# Altium PCB PCB2.PcbDoc
Units mil, origin at the board's own origin, x right, y up, seen from the top; angles counter-clockwise.
Board outline 3180.03 x 2085.02 mil, 2 copper layers (Top Layer, Bottom Layer); 13 components, 12 nets, 33 pads, 0 vias.
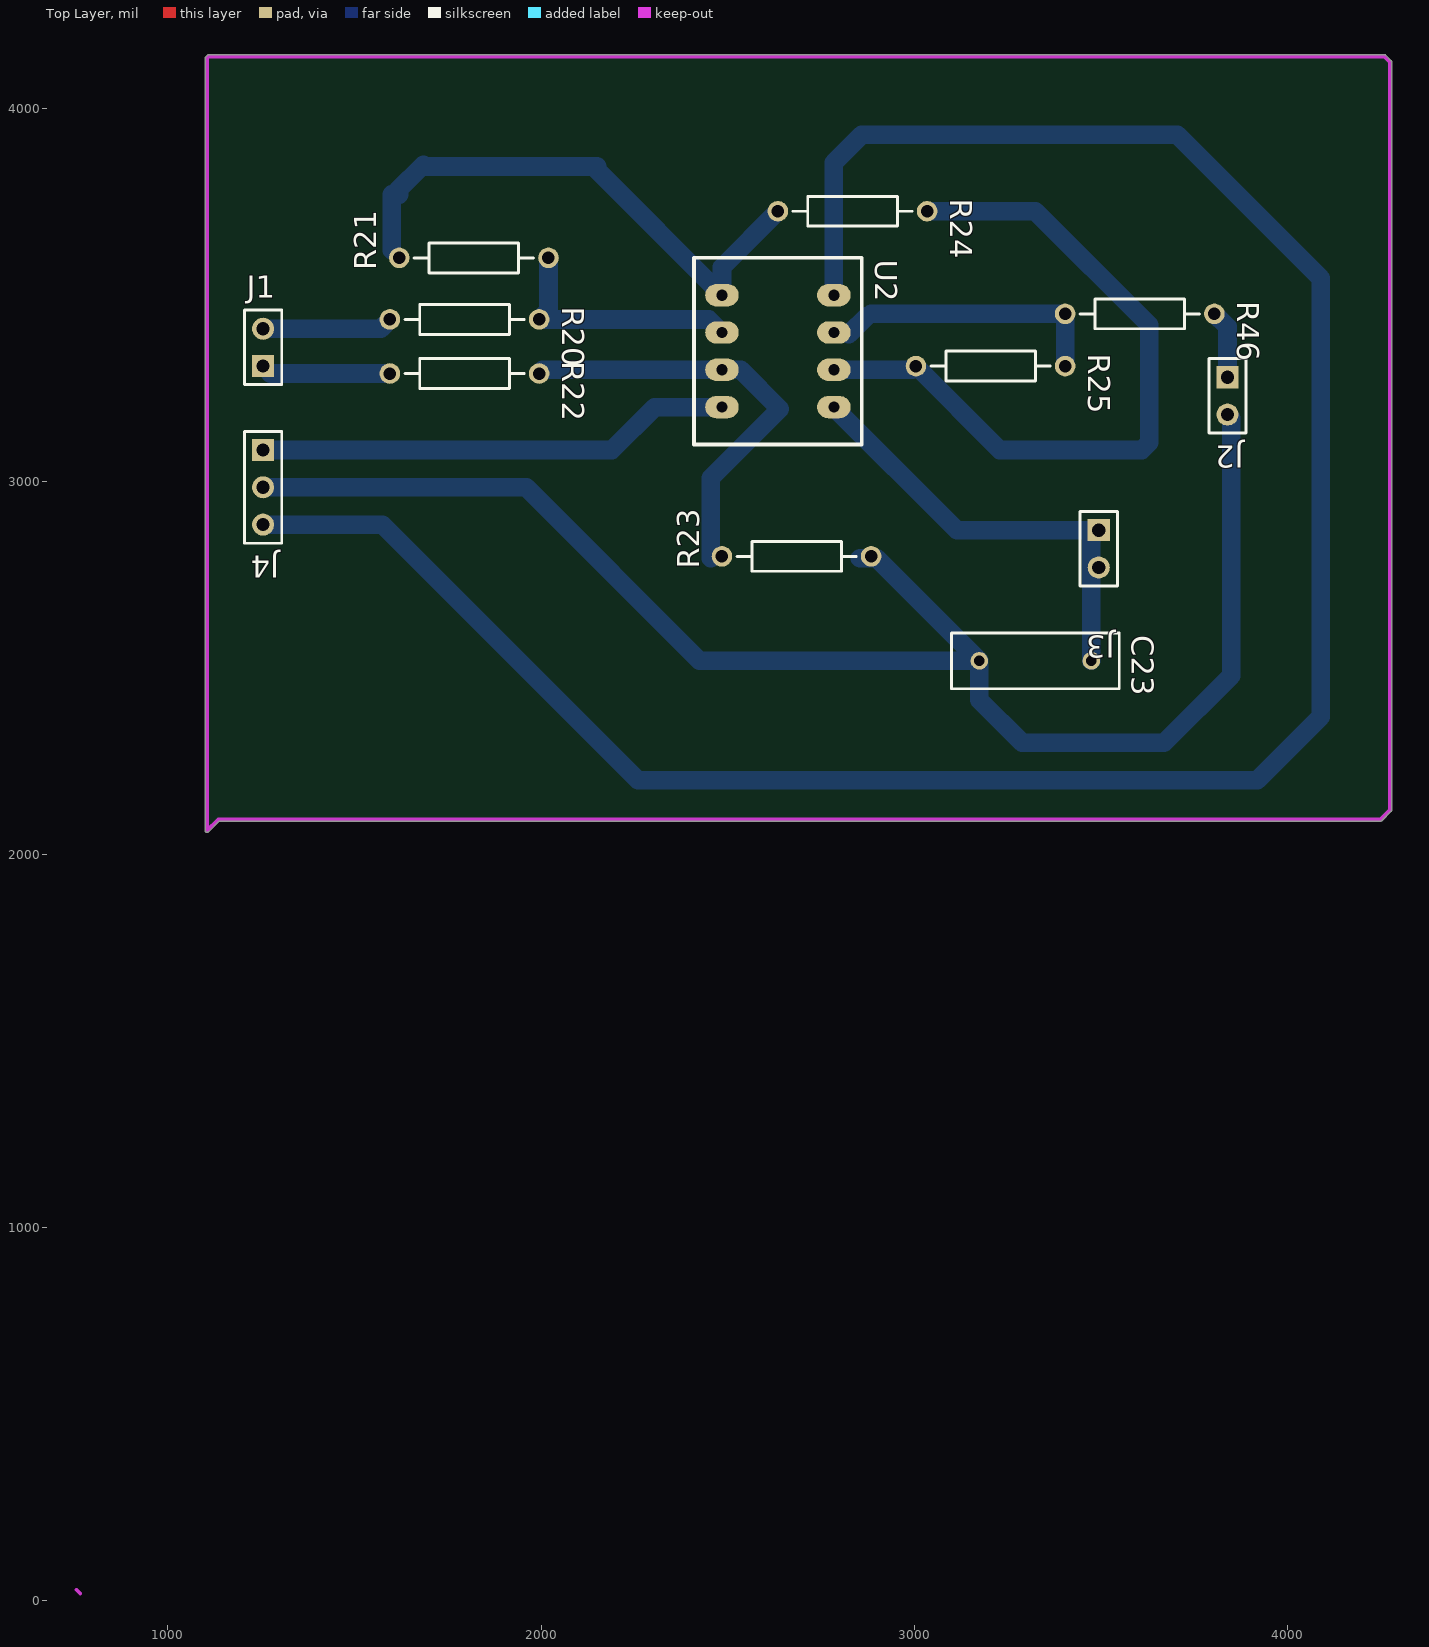
[diagram p0: Top Layer view]
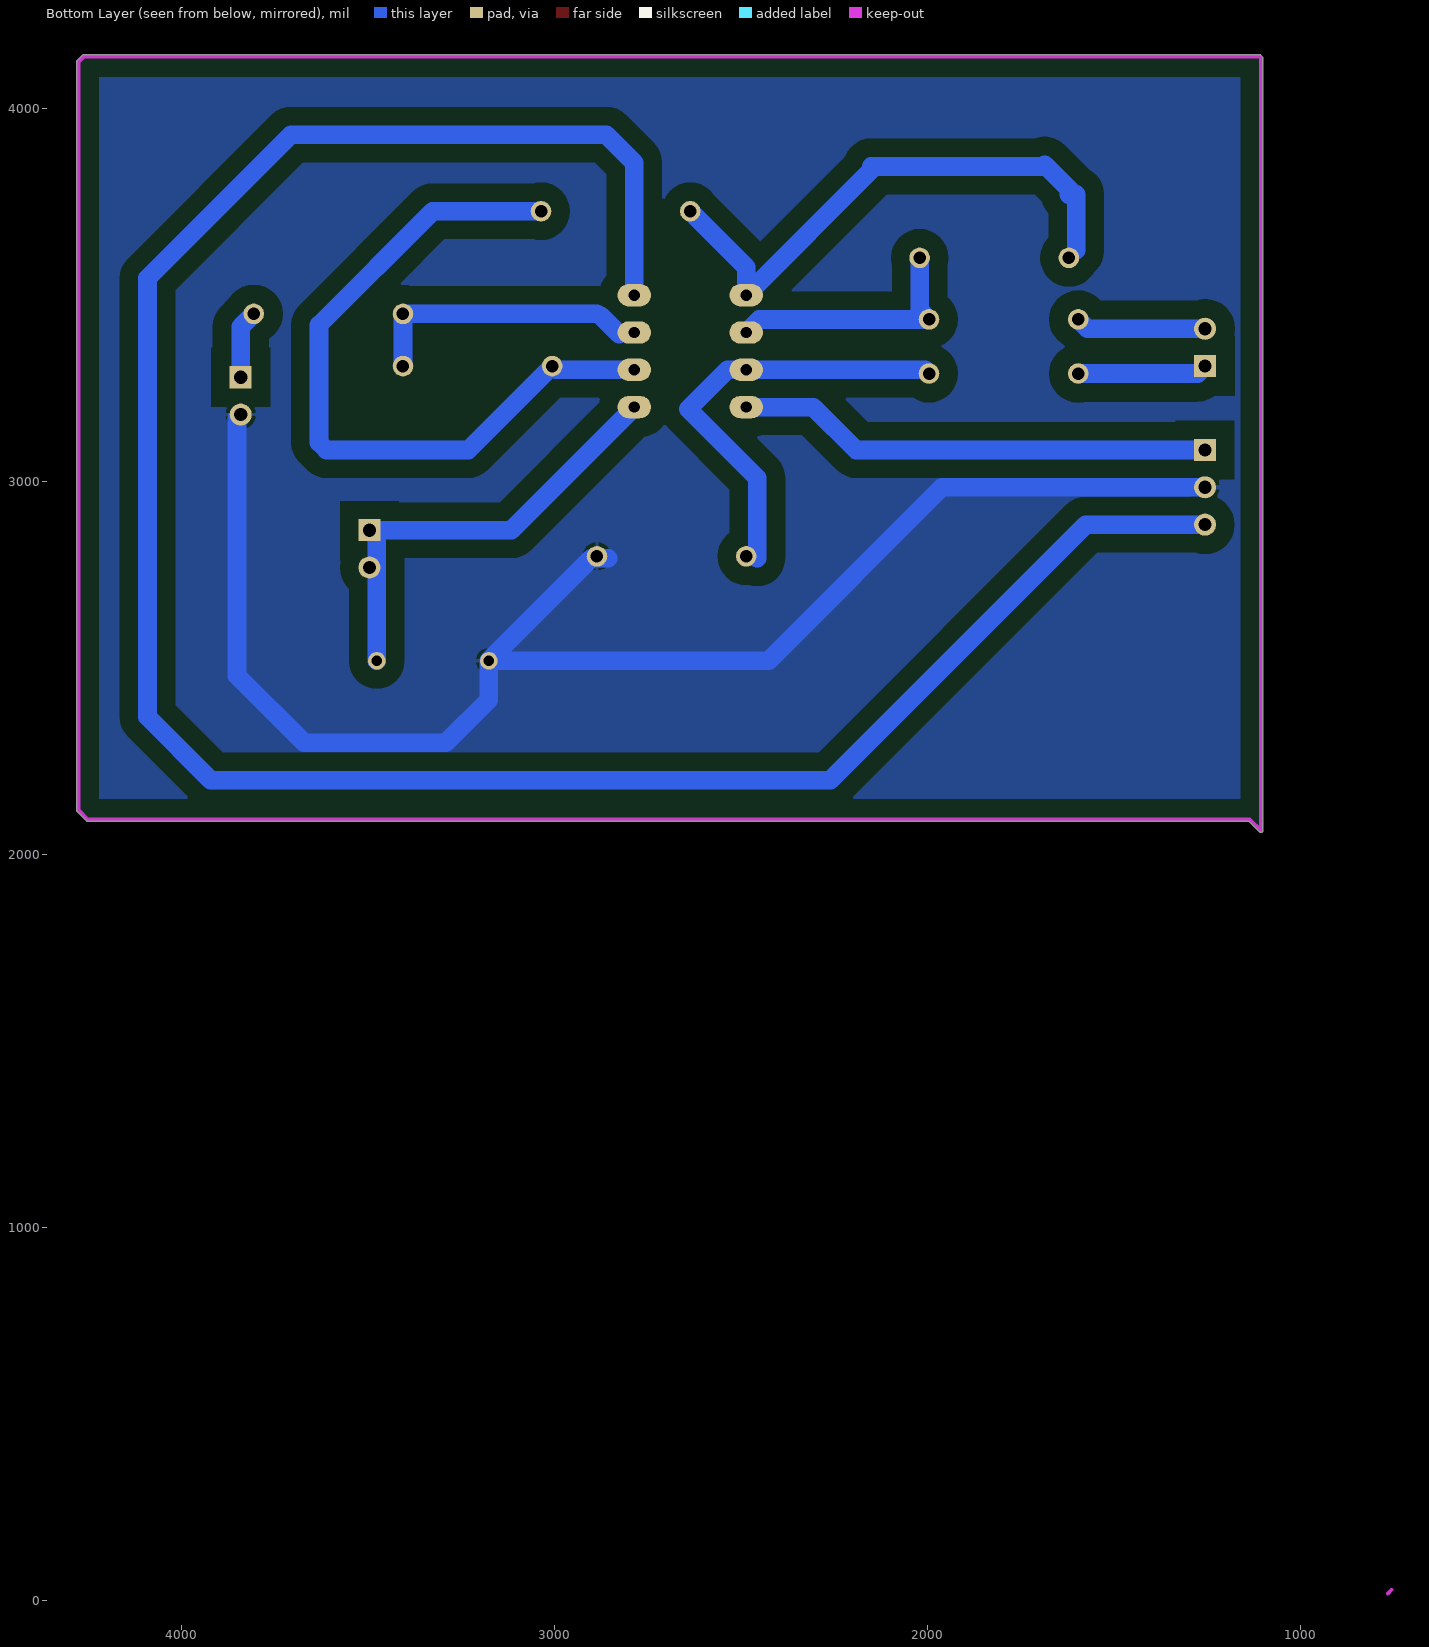
[diagram p1: Bottom Layer view, seen from below]

## Layer stack, top to bottom
Top Layer: signal copper 1.4
Dielectric: dielectric 12.6, FR-4, Dk 4.8
Bottom Layer: signal copper 1.4

## Board outline
1099.99,2065 1099.99,4135 cw(c1105,4135) 1101.47,4138.56 1101.45,4138.55 1106.45,4143.55 1106.44,4143.53 cw(c1110,4140) 1110,4145.02 4260,4145.02 cw(c4260,4140) 4263.56,4143.53 4263.55,4143.55 4278.55,4128.55 4278.53,4128.56 cw(c4275,4125) 4280.02,4125 4280.02,2120 cw(c4275,2120) 4278.53,2116.44 4278.55,2116.45 4253.55,2091.45 4253.56,2091.47 cw(c4250,2095) 4250,2089.99 1137.08,2089.99 1108.55,2061.45 1108.56,2061.47 cw(c1105,2065)

## Design rules (kind name [scope] priority, off if disabled: settings)
Clearance [All] p1: gap=10
PolygonConnect [All] p1: connectstyle=Relief reliefconductorwidth=10 reliefentries=4 polygonreliefangle="90 Angle"
RoutingVias [All] p1: holewidth=28 width=50 viastyle="Through Hole" minholewidth=28 minwidth=50 maxholewidth=28 maxwidth=50
SilkscreenOverComponentPads [All] p1: minsilkscreentomaskgap=10
SolderMaskExpansion [All] p1: expansion=4
TestPointUsage FabricationTestPointUsage [All] p1: valid=0 allowmultiple=FALSE
Testpoint FabricationTestpoint [All] p1: side=3 testpointundercomponent=TRUE minsize=40 maxsize=100 preferedsize=60 minholesize=0 maxholesize=40 preferedholesize=32 testpointgrid=1 style=297 order=0123456789
Width [All] p1: maxlimit=100 minlimit=10 preferedwidth=100
23 further rules are at their usual default settings.

## Components (designator, comment, footprint, x,y, rotation, side; value= is the part's Value field where it differs from the comment)
C23 "Cap" RAD-0.3 3325,2520 r0 top
J1 "Header 2" HDR1X2 1255,3310 r90 top
J2 "Header 2" HDR1X2 3840,3280 r270 top
J3 "Header 2" HDR1X2 3495,2870 r270 top
J4 "Header 3" HDR1X3 1255,3085 r270 top
R20 "Res2" AXIAL-0.4 1795,3435 r0 top
R21 "Res2" AXIAL-0.4 1820,3600 r180 top
R22 "Res2" AXIAL-0.4 1795,3290 r0 top
R23 "Res2" AXIAL-0.4 2685,2800 r180 top
R24 "Res2" AXIAL-0.4 2835,3725 r0 top
R25 "Res2" AXIAL-0.4 3205,3310 r0 top
R46 "Res2" AXIAL-0.4 3605,3450 r0 top
U2 "LM293AD" INA333 2785,3500 r270 top

## Footprints (in the part's own frame and the unit in brackets; to place one, negate y for a bottom-side part, rotate by r counter-clockwise, add the part's x,y. Pads: shape width x height; smd on the part's side, far side on the other; paste and mask are expansions set on the pad)
AXIAL-0.4 [mm] "Axial Device, Thru-Hole; 2 Leads; 0.4 in Pin Spacing"
  round 1.4 hole 0.85: 1(-5.08,0) 2(5.08,0)
  silkscreen extent -4.06,-1.02 4.06,1.02
HDR1X2 [mm] "Connector; Header; 2 Position"
  rect 1.5x1.5 hole 0.9: 1(0,0)
  round 1.5 hole 0.9: 2(2.54,0)
  silkscreen extent -1.27,-1.27 3.81,1.27
HDR1X3 [mm] "Connector; Header; 3 Position"
  rect 1.5x1.5 hole 0.9: 1(0,0)
  round 1.5 hole 0.9: 2(2.54,0) 3(5.08,0)
  silkscreen extent -1.27,-1.27 6.35,1.27
INA333 [mil]
  oval 60x90 hole 30: 1(0,-300) 2(100,-300) 3(200,-300) 4(300,-300) 5(300,0) 6(200,0) 7(100,0) 8(0,0)
  silkscreen extent -100,-375 400,75
RAD-0.3 [mm] "Radial Cap, Thru-Hole; 2 Leads; 0.3 in Pin Spacing"
  round 1.2 hole 0.7: 1(-3.81,0) 2(3.81,0)
  silkscreen extent -5.71,-1.91 5.71,1.91

## Part data
C23: "Capacitor"
J1 J2 J3: "Header, 2-Pin"
J4: "Header, 3-Pin"
R20 R21 R22 R23 R24 R25 R46: "Resistor"
U2: "Low-Power Dual Voltage Comparator"

## Nets (pads, with @x,y where several pads share a name; then routed paths per layer and width w, separated by ;. In a path a pad name is that pad's centre, name@x,y a point inside that pad or via, vN(x,y) a via of type N, cw(c..) or ccw(c..) an arc to the next point about the centre after c; other vN are vias at no path point)
+5V: J4.3 U2.8 | length 6214.7
  Bottom Layer w50: J4.3 1575,2885 2260,2200 3920,2200 4090,2370 4090,3545 3705,3930 2860,3930 2785,3855 U2.8
-5V: J4.1 U2.4 | length 1277.6
  Bottom Layer w50: J4.1 2190,3085 2305,3200 U2.4
GND: C23.1 J2.2 J4.2 R23.1 | length 4138.7
  Bottom Layer w50: J4.2 1960,2985 2425,2520 C23.1 ; 2855,2795 2900,2795 C23.1 ; J2.2@3850,3170 3850,2480 3670,2300 3290,2300 3175,2415 C23.1
NetC23_2: C23.2 J3.1 J3.2 U2.5 | length 1205
  Bottom Layer w50: U2.5 3115,2870 J3.1 3475,2850 C23.2
NetJ1_1: J1.1 R22.1 | length 348.3
  Bottom Layer w50: J1.1 1275,3290 R22.1
NetJ1_2: J1.2 R20.1 | length 350.4
  Bottom Layer w50: J1.2 1570,3410 R20.1
NetJ2_1: J2.1 R46.2 | length 184.5
  Bottom Layer w50: R46.2 3840,3415 J2.1
NetR20_2: R20.2 R21.1 U2.2 | length 679.9
  Bottom Layer w50: R21.1 2020,3460 R20.2 2450,3435 U2.2
NetR21_2: R21.2 R24.1 U2.1 | length 1492
  Bottom Layer w50: 1600,3620 1600,3770 1620,3770 ; 1615,3780 1685,3850 ; 1695,3845 2150,3845 ; 2145,3840 U2.1 2485,3575 R24.1
NetR22_2: R22.2 R23.2 U2.3 | length 1169.3
  Bottom Layer w50: R22.2 2005,3300 U2.3 2535,3300 2640,3195 2455,3010 2455,2795
NetR24_2: R24.2 R25.1 U2.6 | length 1972.8
  Bottom Layer w50: U2.6 R25.1@2995,3300 ; R25.1 3230,3085 3610,3085 3630,3105 3630,3420 3325,3725 R24.2
NetR25_2: R25.2 R46.1 U2.7 | length 730.7
  Bottom Layer w50: U2.7@2825,3395 2875,3445 ; 2885,3450 R46.1 R25.2

## Polygon pours and split planes (outlines as drawn)
GND on Bottom Layer "Bottom Layer-No Net" (solid, remove dead copper, pour order 13): 980,4305 4480,4305 4495,4290 4595,4190 4595,1800 935,1800 885,1850 985,1950 985,4310

## Keep-outs
Keep-Out Layer:
  lines w10: 755,30 765,20 ; 1105,2065 1105,4135 1110,4140 4260,4140 4275,4125 4275,2120 4250,2095 1135,2095 1105,2065